# Altium PCB NBP7 Xilinx Virtex-II BGA456 Rev1.10.PcbDoc (part 1 of 3)
Units mm, origin at the board's own origin, x right, y up, seen from the top; angles counter-clockwise.
Board outline 69 x 80.99 mm, 6 copper layers (Top Layer, MidLayer1, InternalPlane1, InternalPlane2, MidLayer2, Bottom Layer); 101 components, 273 nets, 963 pads, 545 vias.
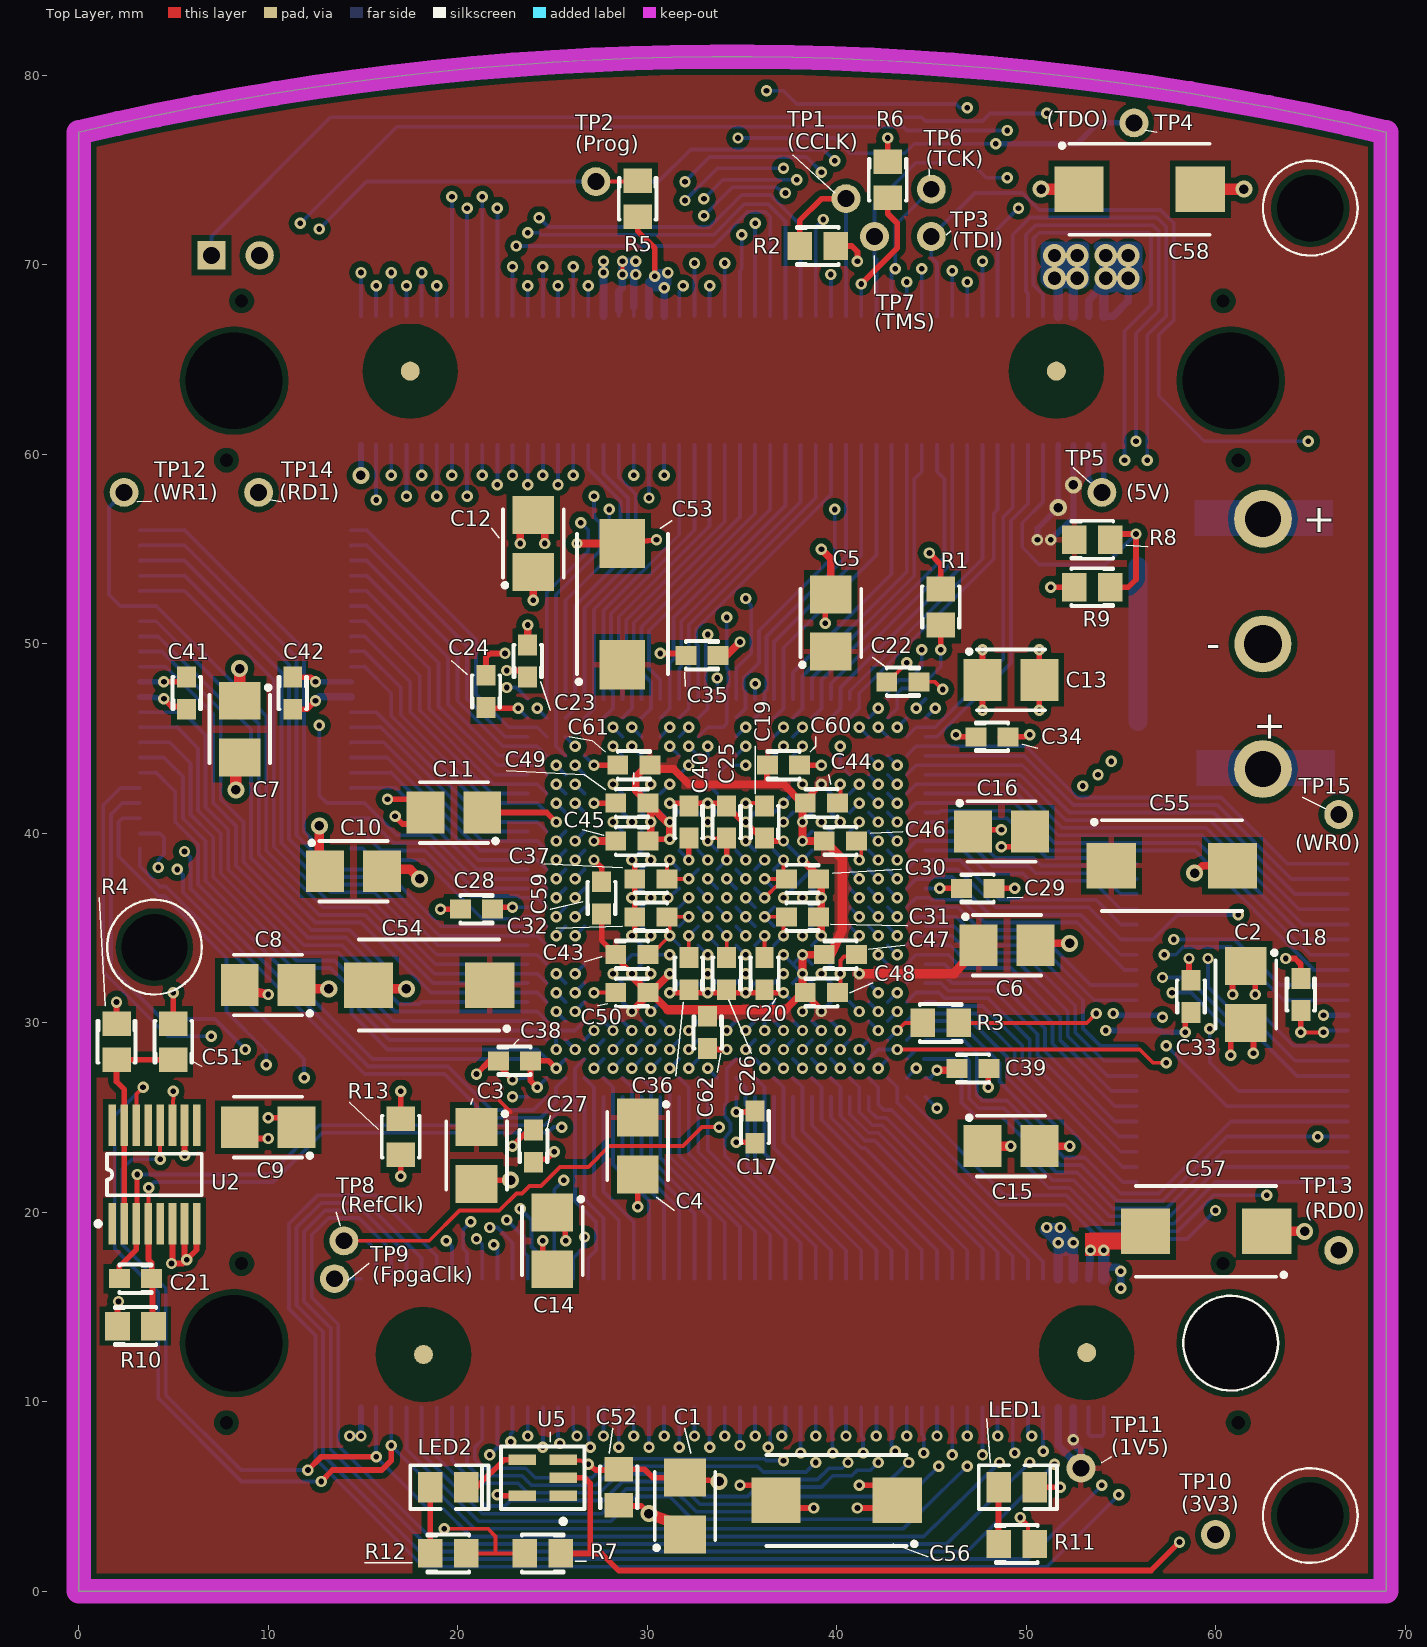
[diagram p0: Top Layer view]
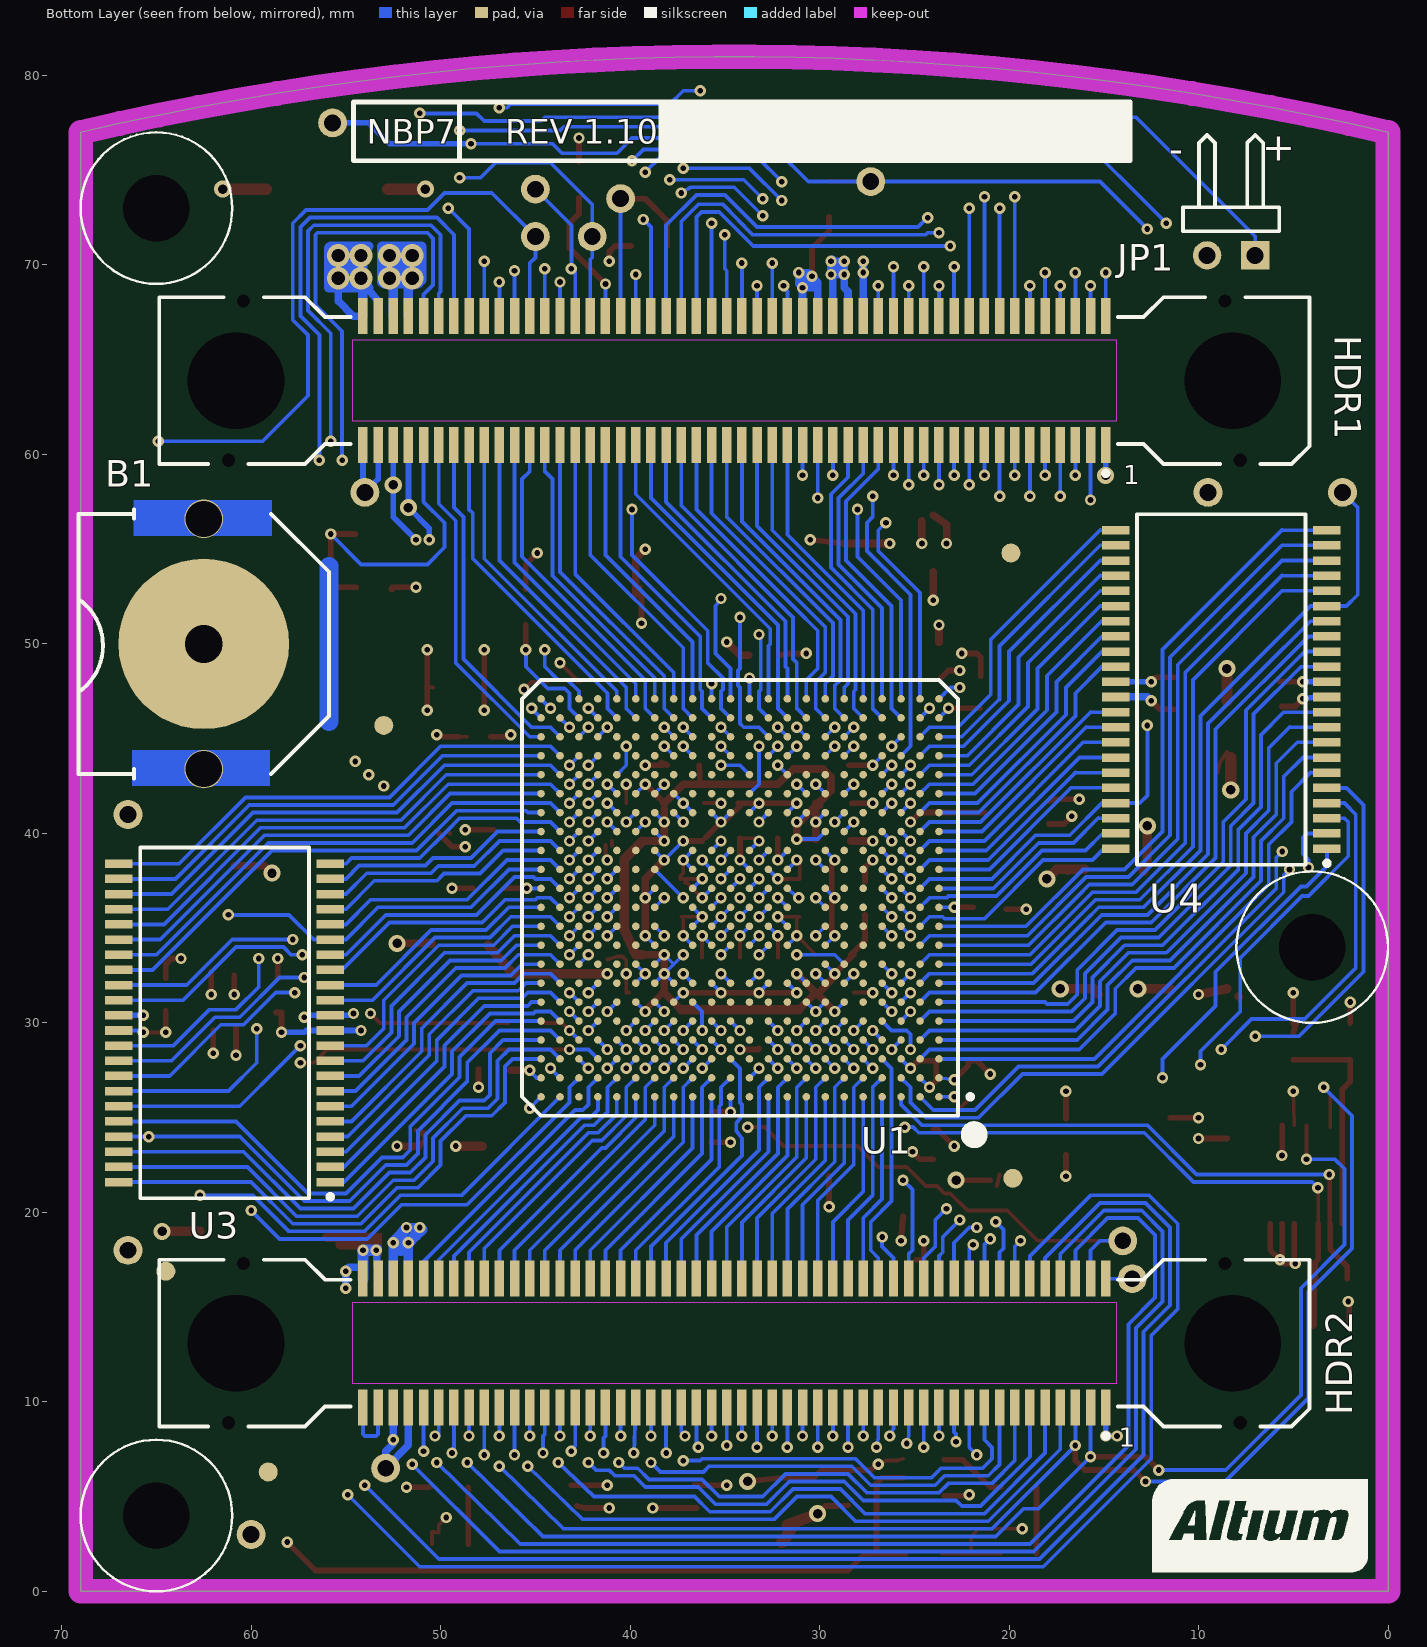
[diagram p1: Bottom Layer view, seen from below]
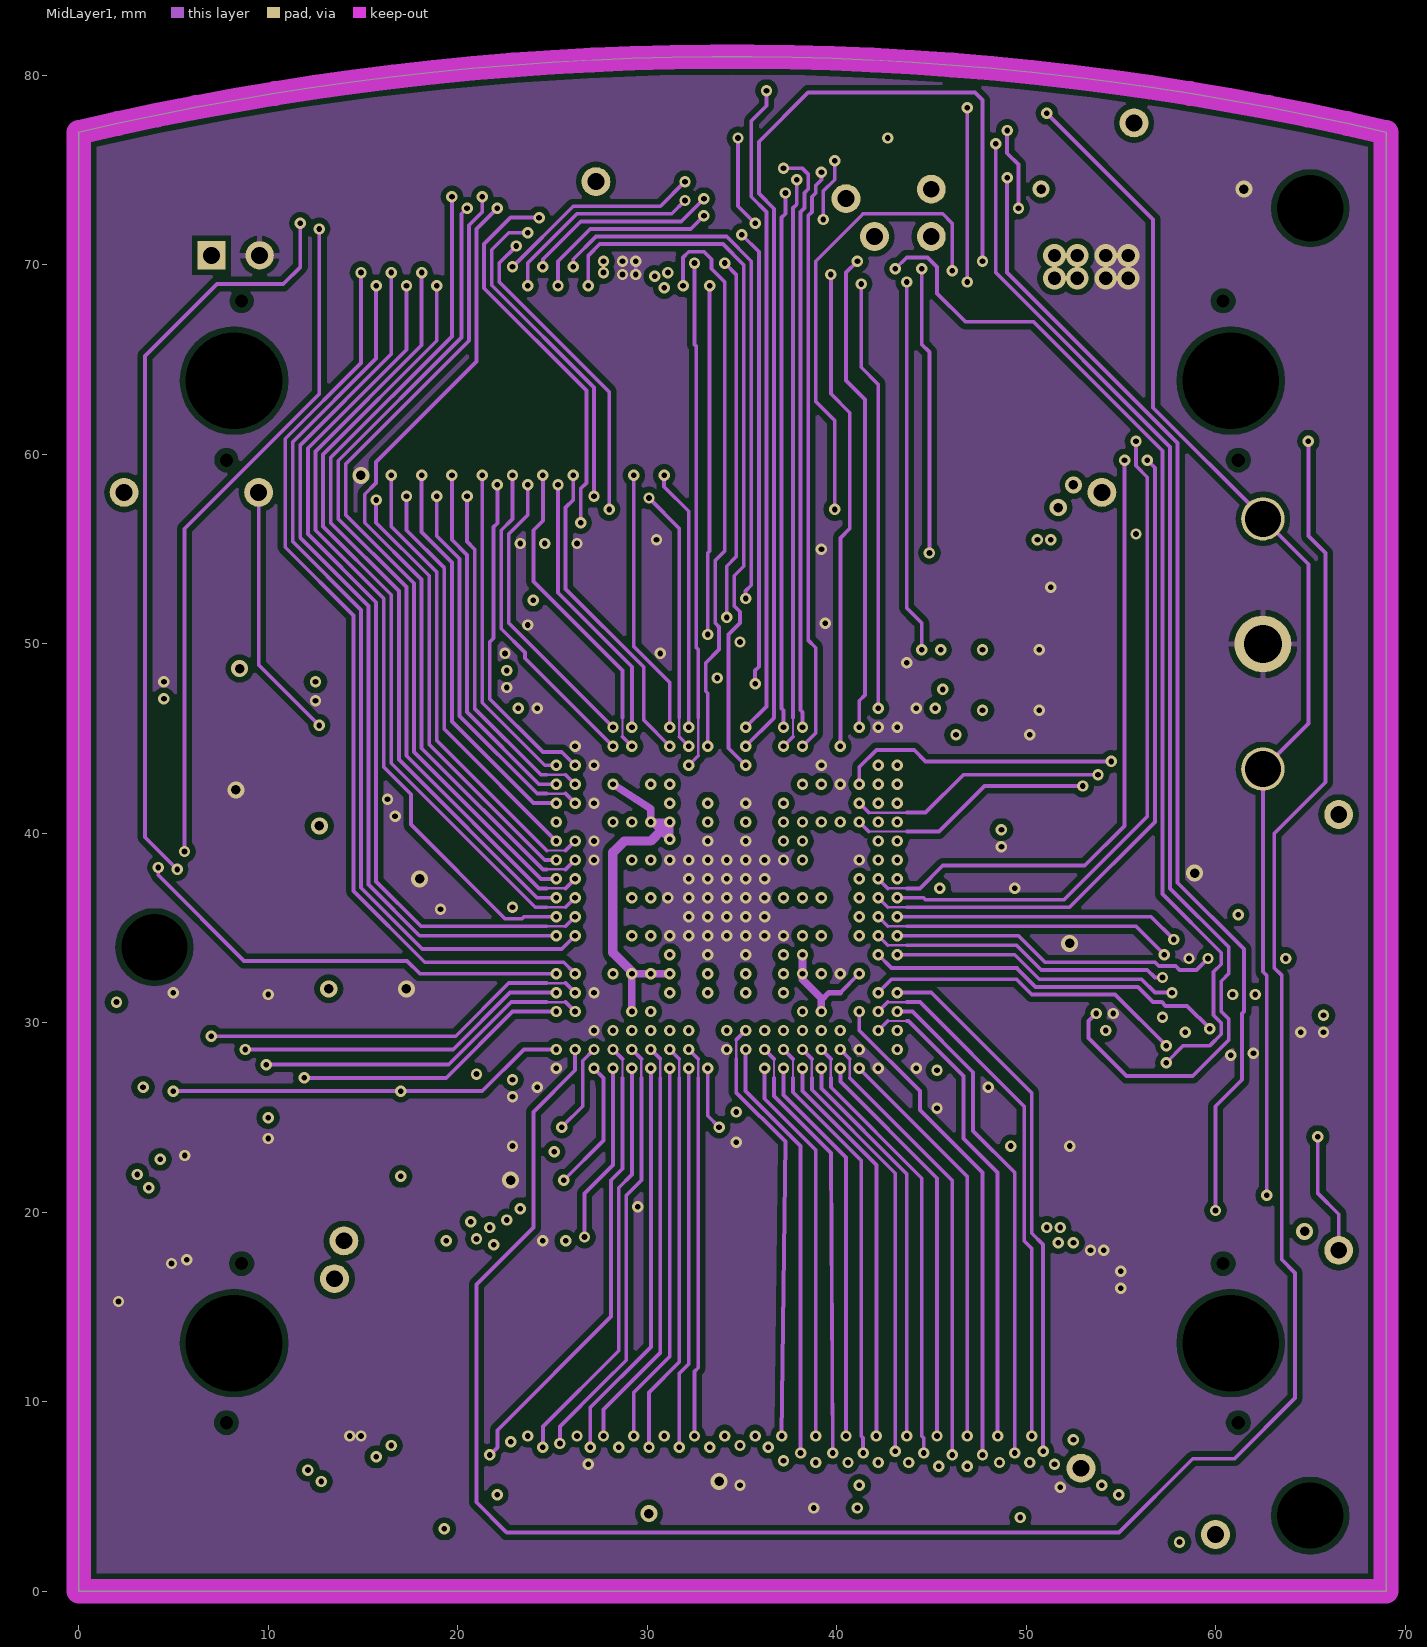
[diagram p2: MidLayer1]
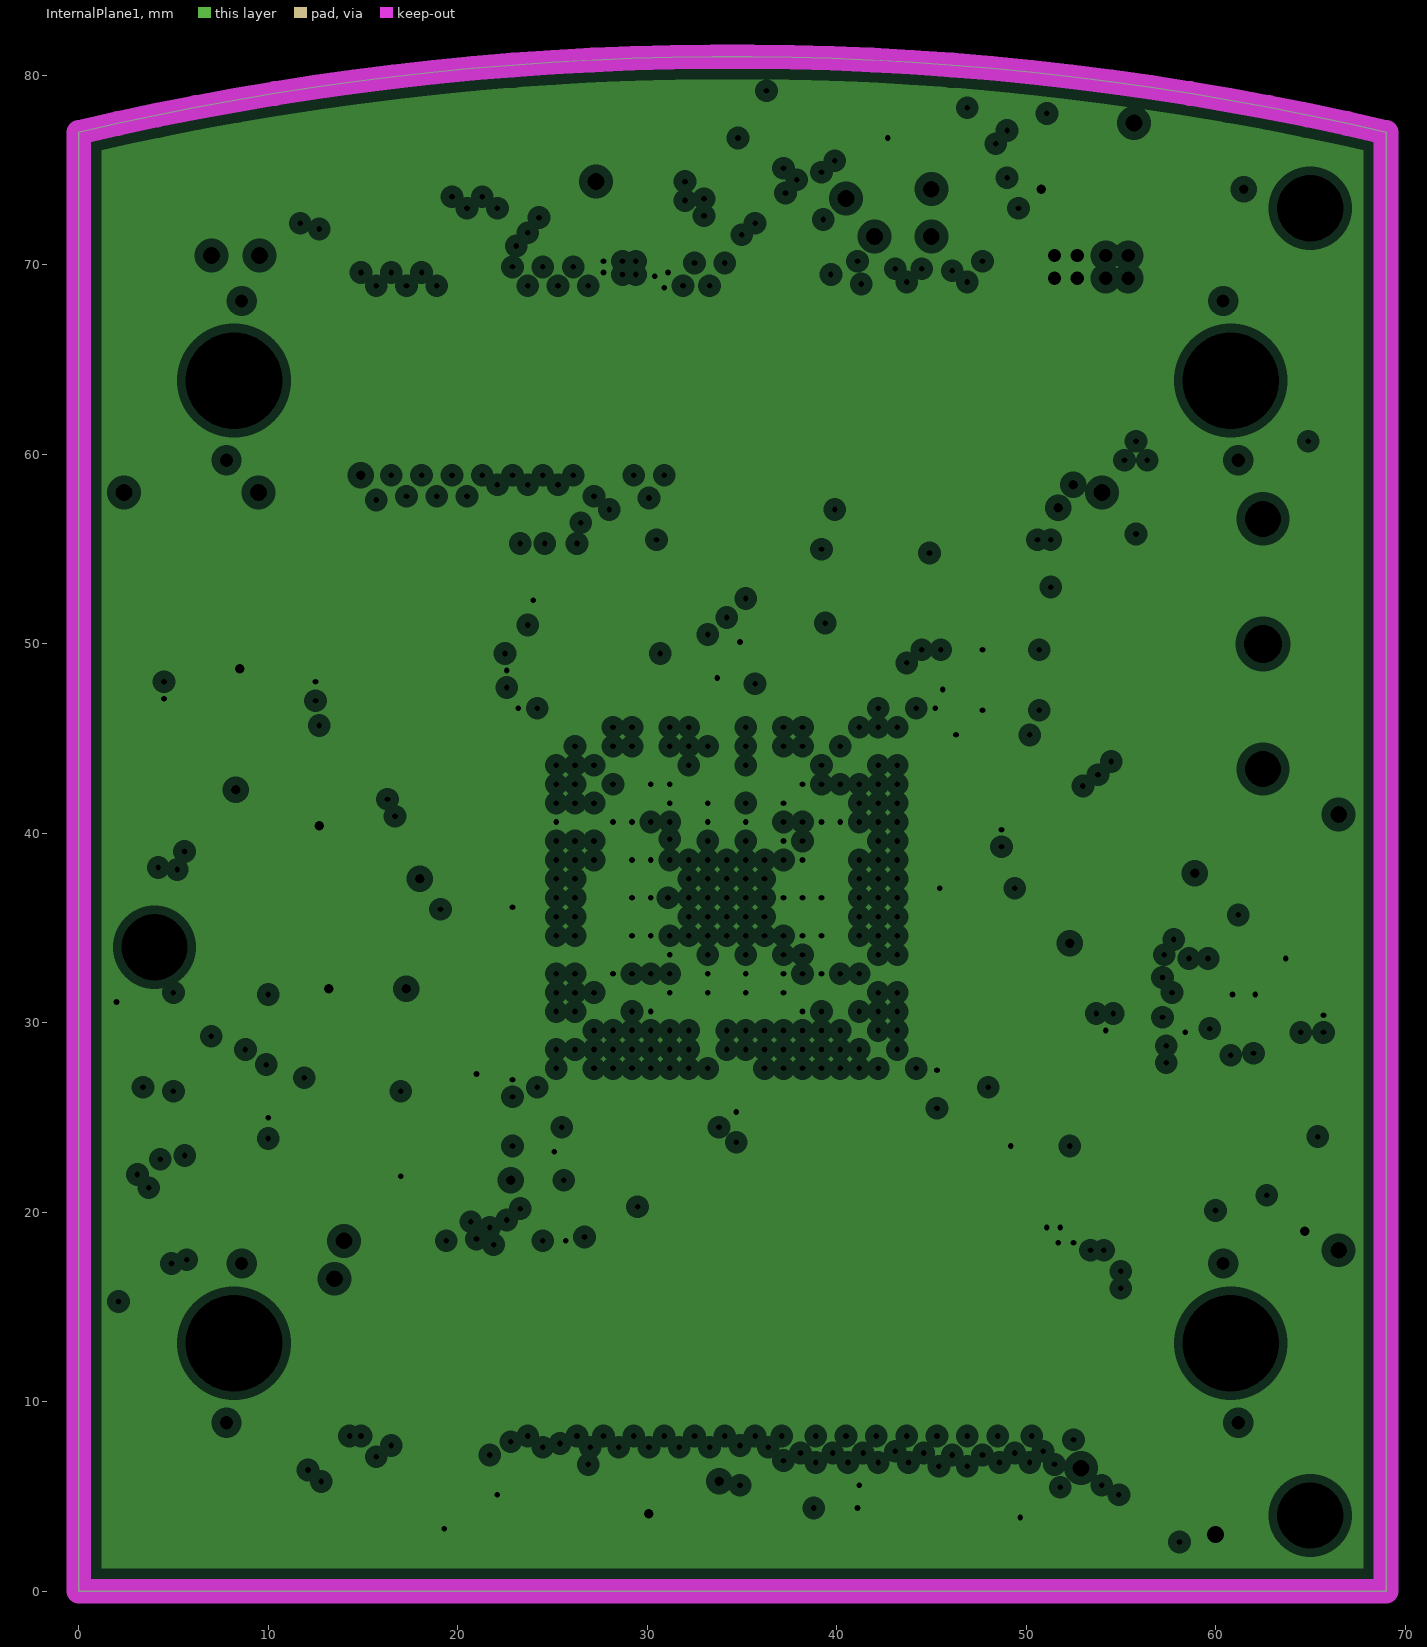
[diagram p3: InternalPlane1, clearances drawn from the general rule]
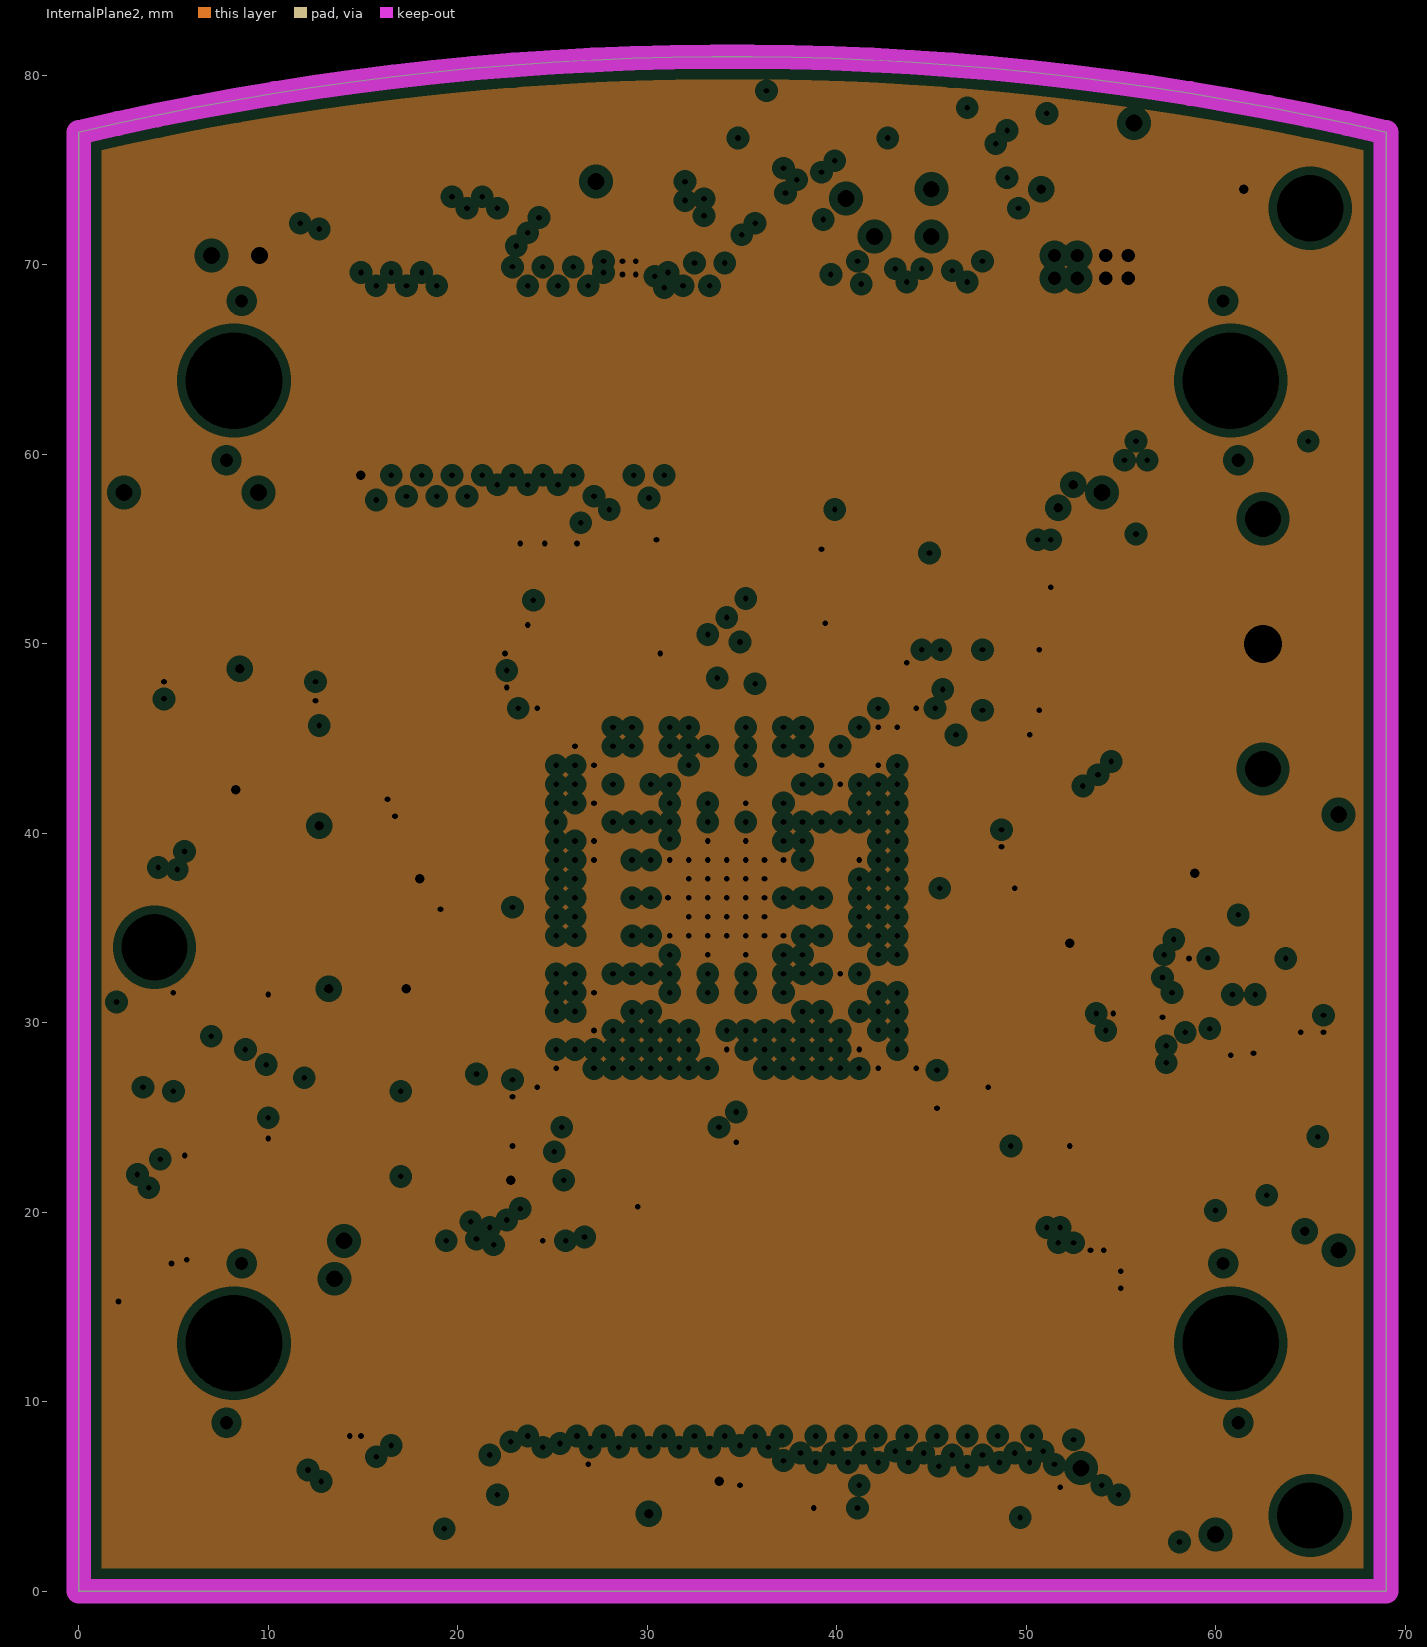
[diagram p4: InternalPlane2, clearances drawn from the general rule]
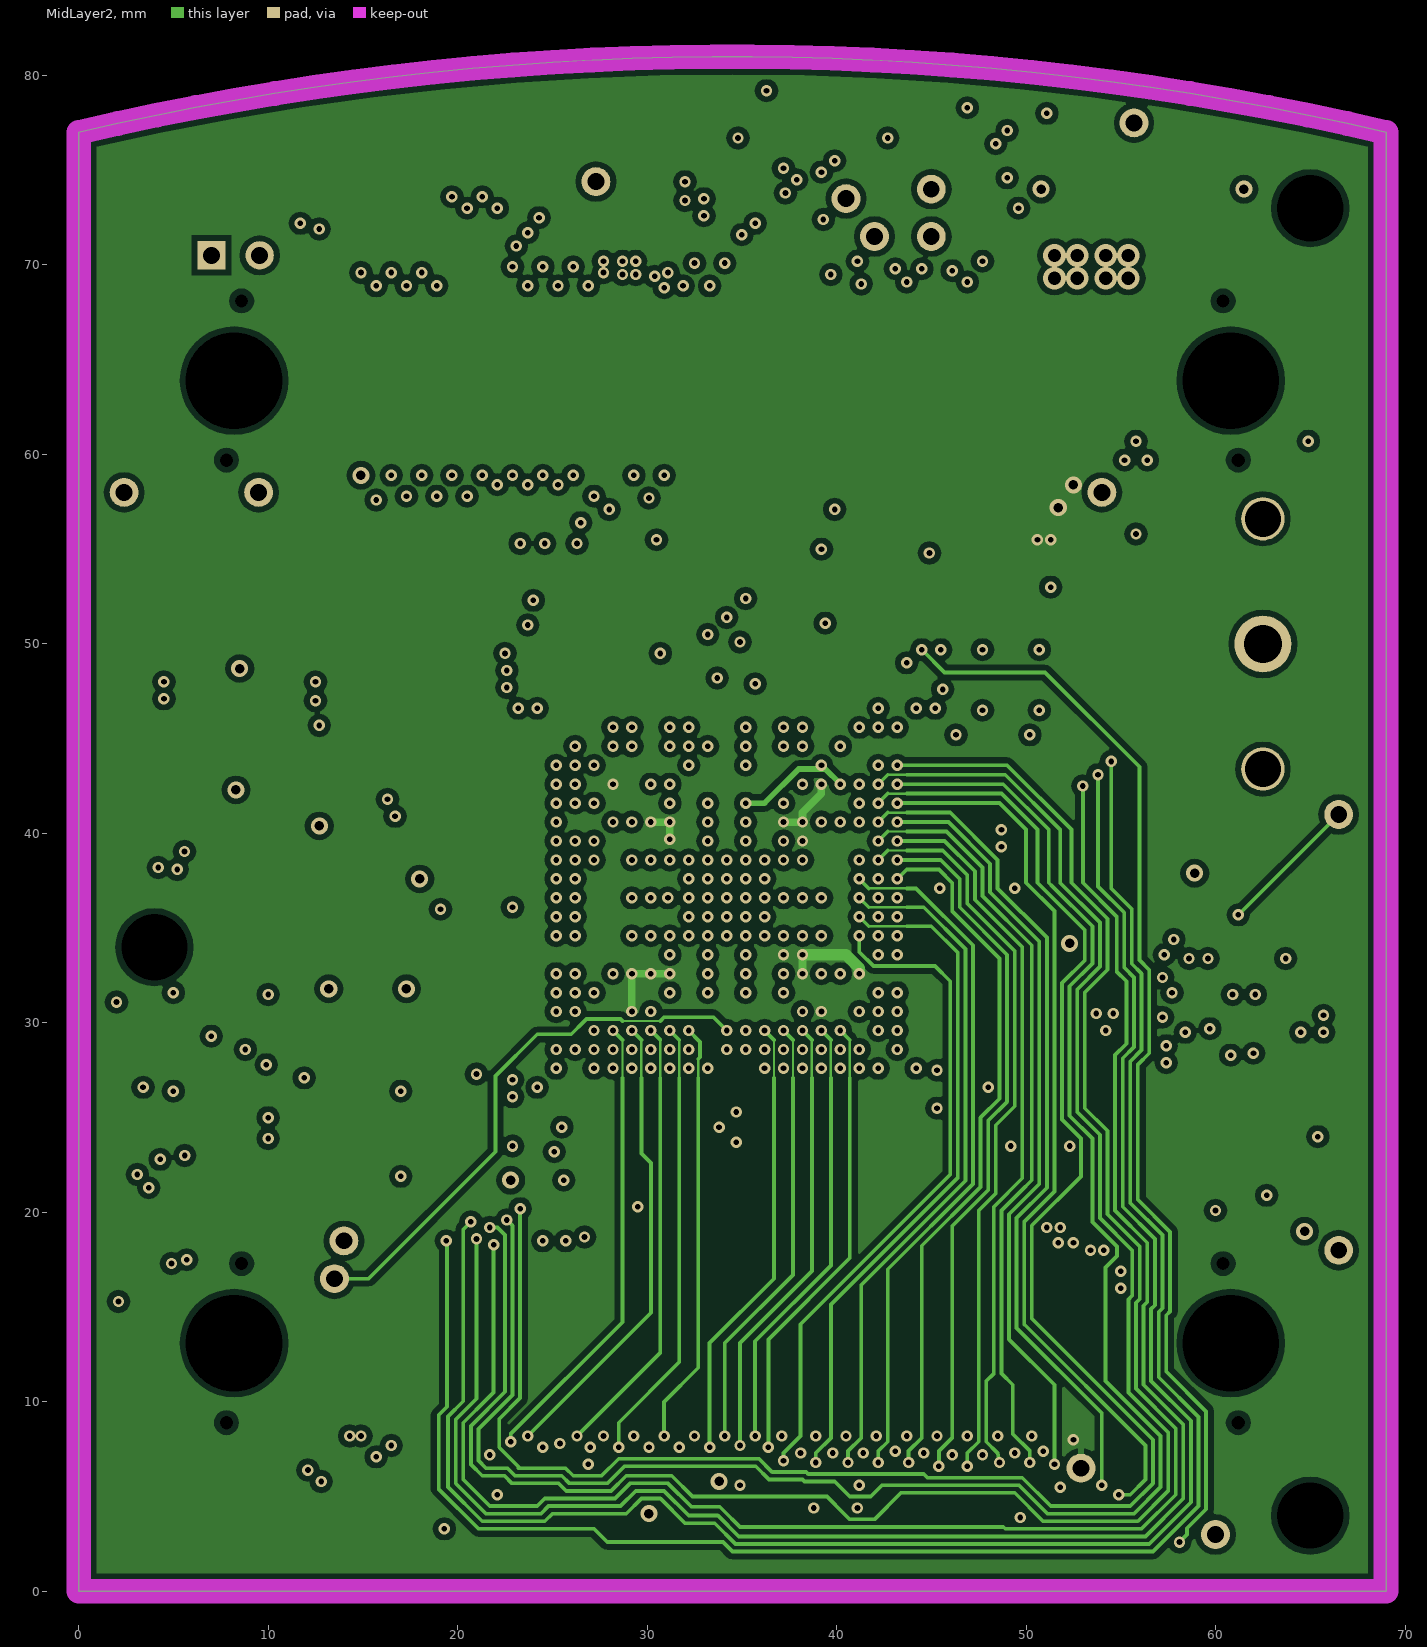
[diagram p5: MidLayer2]

## Layer stack, top to bottom
Top Layer: signal copper 0.0356
Dielectric: core 0.32, FR-4, Dk 4.8
MidLayer1: signal copper 0.0356
Dielectric: prepreg 0.32, FR-4, Dk 4.8
InternalPlane1: plane copper 0.0356, net VCC
Dielectric: core 0.32, FR-4, Dk 4.8
InternalPlane2: plane copper 0.0356, net GND
Dielectric: prepreg 0.32, FR-4, Dk 4.8
MidLayer2: signal copper 0.0356
Dielectric: core 0.32, FR-4, Dk 4.8
Bottom Layer: signal copper 0.0356

## Board outline
0,0 0.001,77 cw(c34.5,-69.801) 69,77 69,0

## Design rules (kind name [scope] priority, off if disabled: settings)
Clearance "Fiducial Clearance" [InPadClass('Fiducials')] p1: gap=2
Clearance Clearance_Polygons [InPolygon] p2: gap=0.3
Clearance "Via Pad Same Net" [IsVia vs IsPad] p3: gap=0.2
Clearance "Via-Via Clearance" [IsVia vs IsVia] p4: gap=0.3
Clearance "Mid Layer Track - Via Clearance" [(OnMid  And IsTrack) vs IsVia] p5: gap=0.127
Clearance "Bottom Layer General Clearance" [All vs OnLayer('Bottom Layer')] p6: gap=0.2
Clearance "Top Layer General Clearance" [All vs OnLayer('Top Layer')] p7: gap=0.2
Clearance "Clearance Top Layer Pads" [(OnLayer('Top Layer')) vs (InPadClass('All Pads'))] p8: gap=0.254
Clearance "General Clearance" [All] p9: gap=0.2
ComponentClearance [All] p1: gap=0.2 collisioncheckmode=3 verticalgap=0.254 showdistances=FALSE
FabricationTestPointUsage TestPointUsage [All] p1 off: valid=0 allowmultiple=FALSE
FabricationTestpoint Testpoint [All] p1 off: side=3 testpointundercomponent=TRUE minsize=1.016 maxsize=2.54 preferedsize=1.524 minholesize=0 maxholesize=1.016 preferedholesize=0.813 testpointgrid=0.025 allowsidetop=TRUE allowsidebottom=TRUE usegrid=TRUE gridtolerance=0
HoleSize [All] p1: absolutevalues=TRUE maxlimit=10 minlimit=0.3 maxpercent=80.000 minpercent=20.000
PlaneClearance [All] p1: clearance=0.45
PlaneConnect [All] p1: planeconnectstyle=Direct reliefexpansion=0.5 reliefentries=4 reliefconductorwidth=0.25 reliefairgap=0.25
PolygonConnect [All] p1: connectstyle=Relief reliefconductorwidth=0.3 reliefentries=4 polygonreliefangle="90 Angle"
RoutingVias [All] p1: holewidth=0.3 width=0.6 viastyle="Through Hole" minholewidth=0.3 minwidth=0.5 maxholewidth=0.5 maxwidth=1
SMDNeckDown [All] p1: percent=100.000
SilkscreenOverComponentPads [All] p1: minsilkscreentomaskgap=0.254
SolderMaskExpansion SolderMaskExpansion_Vias [IsVia] p1: expansion=-0.65
SolderMaskExpansion [All] p2: expansion=0.25
Width [All] p1: maxlimit=1.5 minlimit=0.127 preferedwidth=0.2 toplayer_minwidth=0.2 toplayer_prefwidth=0.203 bottomlayer_minwidth=0.2
21 further rules are at their usual default settings.

## Classes and differential pairs
pad class Fiducials: Free-4 Free-5 Free-6 Free-7
pad class PAR_DATA: U1-AA3 U1-AA4 U1-AA18 U1-AB4 U1-R18 U1-V17 U1-W5 U1-W18 U1-Y4 U1-Y5
pad class IO_CLK: U1-AB12 U1-B11 U1-E12 U1-V11
pad class IO: U1-A4 U1-A5 U1-A6 U1-A10 U1-A13 U1-A17 U1-A18 U1-A19 U1-AA5 U1-AA10 U1-AA13 U1-AA17 U1-AA18 U1-AA20 U1-AB5 U1-AB10 U1-AB13 U1-AB17 U1-AB18 U1-B4 U1-B5 U1-B6 U1-B10 U1-B12 U1-B13 U1-B17 U1-B18 U1-B19 U1-C1 U1-C2 U1-C4 U1-C5 U1-C6 U1-C10 U1-C12 U1-C13 U1-C18 U1-C21 U1-D1 U1-D2 U1-D6 U1-D10 U1-D13 U1-D17 U1-D18 U1-D21 U1-E1 U1-E2 U1-E3 U1-E4 U1-E5 U1-E6 U1-E7 U1-E8 U1-E10 U1-E11 U1-E13 U1-E14 U1-E16 U1-E17 U1-E18 U1-E19 U1-E20 U1-E21 U1-E22 U1-F10 U1-F11 U1-F18 U1-G1 U1-G2 U1-G21 U1-G22 U1-H1 U1-H2 U1-H3 U1-H4 U1-H5 U1-H19 U1-H20 U1-H21 U1-H22 U1-J6 U1-J17 U1-J18 U1-K1 U1-K2 U1-K3 U1-K4 U1-K21 U1-K22 U1-L2 U1-L3 U1-L4 U1-L5 U1-L17 U1-L18 U1-L19 U1-L20 U1-L21 U1-L22 U1-M1 U1-M2 U1-M3 U1-M4 U1-M5 U1-M6 U1-M17 U1-M18 U1-M19 U1-M20 U1-M21 U1-N1 U1-N2 U1-N17 U1-N21 U1-P5 U1-P6 U1-P17 U1-R1 U1-R2 U1-R3 U1-R4 U1-R18 U1-R19 U1-R20 U1-R21 U1-R22 U1-T1 U1-T2 U1-T21 U1-T22 U1-U3 U1-U4 U1-U5 U1-U10 U1-U11 U1-U12 U1-U13 U1-V3 U1-V4 U1-V5 U1-V6 U1-V7 U1-V9 U1-V10 U1-V12 U1-V13 U1-V19 U1-V20 U1-V21 U1-V22 U1-W1 U1-W2 U1-W6 U1-W10 U1-W13 U1-W17 U1-W21 U1-W22
pad class IN_ONLY: U1-A11 U1-AA11 U1-AA12 U1-C11 U1-D12 U1-F11 U1-F12 U1-F14 U1-J22 U1-W11 U1-W12 U1-Y12
pad class 500andUp: U1-A8 U1-A9 U1-A14 U1-A15 U1-AA8 U1-AA9 U1-AA14 U1-AA15 U1-AB8 U1-AB14 U1-AB15 U1-B8 U1-B9 U1-B14 U1-B15 U1-C9 U1-C14 U1-C15 U1-D9 U1-D14 U1-D15 U1-E9 U1-F9 U1-J1 U1-J2 U1-J3 U1-J4 U1-J5 U1-J19 U1-J20 U1-J21 U1-J22 U1-K5 U1-K6 U1-K17 U1-K18 U1-K19 U1-K20 U1-L6 U1-N3 U1-N4 U1-N5 U1-N6 U1-N18 U1-N19 U1-N20 U1-P1 U1-P2 U1-P3 U1-P4 U1-P18 U1-P19 U1-P20 U1-P21 U1-P22 U1-U11 U1-U14 U1-V9 U1-V14 U1-W8 U1-W9 U1-W14 U1-Y8 U1-Y14

## Components (designator, comment, footprint, x,y, rotation, side; value= is the part's Value field where it differs from the comment)
B1 "CoinCellHolder" COINCELLHOLDER12THM 62.5,43.396 r90 bottom
C1 "10uF" MCCT-B 32,4.5 r90 top
C2 "10uF" MCCT-B 61.6,31.5 r270 top
C3 "10uF" MCCT-B 21,23 r270 top
C4 "10uF" MCCT-B 29.5,23.5 r270 top
C5 "10uF" MCCT-B 39.7,51.1 r90 top
C6 "10uF" MCCT-B 49,34.1 r0 top
C7 "10uF" MCCT-B 8.5,45.5 r270 top
C8 "10uF" MCCT-B 10,32 r180 top
C9 "10uF" MCCT-B 10,24.5 r180 top
C10 "10uF" MCCT-B 14.5,38 r0 top
C11 "10uF" MCCT-B 19.8,41.1 r180 top
C12 "10uF" MCCT-B 24,55.3 r90 top
C13 "10uF" MCCT-B 49.2,48.1 r0 top
C14 "10uF" MCCT-B 25,18.5 r270 top
C15 "10uF" MCCT-B 49.2,23.5 r0 top
C16 "10uF" MCCT-B 48.7,40.1 r0 top
C17 "10nF" CC1608-0603#1 35.7,24.5 r270 top
C18 "10nF" CC1608-0603#1 64.5,31.5 r270 top
C19 "10nF" CC1608-0603#1 36.2,40.6 r90 top
C20 "10nF" CC1608-0603#2 36.2,32.6 r90 top
C21 "10nF" CC1608-0603#1 3,16.5 r180 top
C22 "10nF" CC1608-0603#1 43.5,48 r180 top
C23 "10nF" CC1608-0603#1 23.7,49.1 r90 top
C24 "10nF" CC1608-0603#1 21.5,47.5 r90 top
C25 "10nF" CC1608-0603#1 34.2,40.6 r270 top
C26 "10nF" CC1608-0603#1 34.2,32.6 r90 top
C27 "10nF" CC1608-0603#1 24,23.5 r90 top
C28 "10nF" CC1608-0603#1 21,36 r180 top
C29 "10nF" CC1608-0603#1 47.45,37.1 r0 top
C30 "10nF" CC1608-0603#1 38.2,37.6 r180 top
C31 "10nF" CC1608-0603#1 38.2,35.6 r180 top
C32 "10nF" CC1608-0603#1 30.2,35.6 r0 top
C33 "10nF" CC1608-0603#1 58.7,31.4 r90 top
C34 "10nF" CC1608-0603#1 48.2,45.1 r0 top
C35 "10nF" CC1608-0603#1 32.9,49.4 r180 top
C36 "10nF" CC1608-0603#1 32.2,32.6 r90 top
C37 "10nF" CC1608-0603#1 30.2,37.6 r0 top
C38 "10nF" CC1608-0603#1 23,28 r0 top
C39 "10nF" CC1608-0603#1 47.2,27.6 r0 top
C40 "10nF" CC1608-0603#1 32.2,40.6 r270 top
C41 "10nF" CC1608-0603#1 5.7,47.4 r90 top
C42 "10nF" CC1608-0603#1 11.3,47.4 r270 top
C43 "10nF" CC1608-0603#1 29.2,33.6 r0 top
C44 "10nF" CC1608-0603#1 39.2,41.6 r0 top
C45 "10nF" CC1608-0603#1 29.2,39.6 r180 top
C46 "10nF" CC1608-0603#1 40.2,39.6 r0 top
C47 "10nF" CC1608-0603#1 40.2,33.6 r0 top
C48 "10nF" CC1608-0603#1 39.2,31.6 r0 top
C49 "10nF" CC1608-0603#1 29.2,41.6 r180 top
C50 "10nF" CC1608-0603#1 29.2,31.6 r180 top
C51 "0.1uF" CC2012-0805 5,29 r90 top
C52 "0.1uF" CC2012-0805 28.5,5.5 r90 top
C53 "220uF/4V" MCCT-D 28.7,52.1 r90 top
C54 "220uF/4V" MCCT-D 18.5,32 r180 top
C55 "220uF/4V" MCCT-D 57.7,38.3 r0 top
C56 "220uF/4V" MCCT-D 40,4.8 r180 top
C57 "220uF/4V" MCCT-D 59.5,19 r180 top
C58 "220uF/4V" MCCT-D 56,74 r0 top
C59 "10nF" CC1608-0603#1 27.6,36.6 r90 top
C60 "10nF" CC1608-0603#1 37.2,43.6 r0 top
C61 "10nF" CC1608-0603#1 29.3,43.6 r180 top
C62 "10nF" CC1608-0603#1 33.2,29.5 r270 top
HDR1 "54075-1009-HD1" 54075 34.5,63.9 r0 bottom locked
HDR2 "54075-1009-HD2" 54075 34.5,13.1 r0 bottom locked
JP1 "Header 2H" HDR1X2H 7,70.5 r0 bottom
LED1 "HSMH-C170" "SMD _LED" 49.5,5.5 r180 top locked
LED2 "HSMG-C170" "SMD _LED" 19.5,5.5 r180 top locked
R1 "100R" CC2012-0805 45.5,51.95 r90 top
R2 "100R" CC2012-0805 39,71 r0 top
R3 "100R" CC2012-0805 45.5,30 r180 top
R4 "100R" CC2012-0805 2,29 r270 top
R5 "470R" CC2012-0805 29.5,73.5 r270 top
R6 "470R" CC2012-0805 42.7,74.5 r270 top
R7 "470R" CC2012-0805 24.5,2 r180 top
R8 "DO NOT INSTALL" CC2012-0805 53.5,55.5 r0 top
R9 "47R" CC2012-0805 53.5,53 r180 top
R10 "1M" CC2012-0805 3,14 r0 top
R11 "270R" CC2012-0805 49.5,2.5 r0 top
R12 "270R" CC2012-0805 19.5,2 r0 top
R13 "4k7" CR2012-0805 17,24 r90 top
TP1 "(CCLK)" TestPin 40.5,73.5 r0 top
TP2 "(Prog)" TestPin 27.3,74.4 r90 top
TP3 "(TDI)" TestPin 45,71.5 r90 top
TP4 "(TDO)" TestPin 55.7,77.5 r90 top
TP5 "(5V)" TestPin 54,58 r90 top
TP6 "(TCK)" TestPin 45,74 r90 top
TP7 "(TMS)" TestPin 42,71.5 r90 top
TP8 "(RefClk)" TestPin 14,18.5 r90 top
TP9 "(FpgaClk)" TestPin 13.5,16.5 r90 top
TP10 "(3V3)" TestPin 60,3 r90 top
TP11 "(1V5)" TestPin 52.9,6.5 r90 top
TP12 "(WR1)" TestPin 2.4,58 r90 top
TP13 "(RD0)" TestPin 66.5,18 r90 top
TP14 "(RD1)" TestPin 9.5,58 r90 top
TP15 "(WR0)" TestPin 66.5,41 r90 top
U1 "XC2V1000-4FG456C" FG456 34.2,36.6 r0 bottom
U2 "MAX1617DBR2" QSOP16 4,22 r0 top
U3 "SRAM 512Kx16 TSOP44" SO-G44/P.8 61.4,30 r90 bottom
U4 "SRAM 512Kx16 TSOP44" SO-G44/P.8 8.8,47.6 r90 bottom
U5 "SN74LVC1G04DBV" SO-G5/P.95 24.5,6 r90 top

## Footprints (in the part's own frame and the unit in brackets; to place one, negate y for a bottom-side part, rotate by r counter-clockwise, add the part's x,y. Pads: shape width x height; smd on the part's side, far side on the other; paste and mask are expansions set on the pad)
54075 [mm] "Connector; Docking Station, Receptacle; 100 Position; Vertical"
  rect 0.5x1.9 smd: 1(-19.6,3.4) 2(-19.6,-3.4) 3(-18.8,3.4) 4(-18.8,-3.4) 5(-18,3.4) 6(-18,-3.4) 7(-17.2,3.4) 8(-17.2,-3.4) 9(-16.4,3.4) 10(-16.4,-3.4) 11(-15.6,3.4) 12(-15.6,-3.4) 13(-14.8,3.4) 14(-14.8,-3.4) 15(-14,3.4) 16(-14,-3.4) 17(-13.2,3.4) 18(-13.2,-3.4) 19(-12.4,3.4) 20(-12.4,-3.4) 21(-11.6,3.4) 22(-11.6,-3.4) 23(-10.8,3.4) 24(-10.8,-3.4) 25(-10,3.4) 26(-10,-3.4) 27(-9.2,3.4) 28(-9.2,-3.4) 29(-8.4,3.4) 30(-8.4,-3.4) 31(-7.6,3.4) 32(-7.6,-3.4) 33(-6.8,3.4) 34(-6.8,-3.4) 35(-6,3.4) 36(-6,-3.4) 37(-5.2,3.4) 38(-5.2,-3.4) 39(-4.4,3.4) 40(-4.4,-3.4) 41(-3.6,3.4) 42(-3.6,-3.4) 43(-2.8,3.4) 44(-2.8,-3.4) 45(-2,3.4) 46(-2,-3.4) 47(-1.2,3.4) 48(-1.2,-3.4) 49(-0.4,3.4) 50(-0.4,-3.4) 51(0.4,3.4) 52(0.4,-3.4) 53(1.2,3.4) 54(1.2,-3.4) 55(2,3.4) 56(2,-3.4) 57(2.8,3.4) 58(2.8,-3.4) 59(3.6,3.4) 60(3.6,-3.4) 61(4.4,3.4) 62(4.4,-3.4) 63(5.2,3.4) 64(5.2,-3.4) 65(6,3.4) 66(6,-3.4) 67(6.8,3.4) 68(6.8,-3.4) 69(7.6,3.4) 70(7.6,-3.4) 71(8.4,3.4) 72(8.4,-3.4) 73(9.2,3.4) 74(9.2,-3.4) 75(10,3.4) 76(10,-3.4) 77(10.8,3.4) 78(10.8,-3.4) 79(11.6,3.4) 80(11.6,-3.4) 81(12.4,3.4) 82(12.4,-3.4) 83(13.2,3.4) 84(13.2,-3.4) 85(14,3.4) 86(14,-3.4) 87(14.8,3.4) 88(14.8,-3.4) 89(15.6,3.4) 90(15.6,-3.4) 91(16.4,3.4) 92(16.4,-3.4) 93(17.2,3.4) 94(17.2,-3.4) 95(18,3.4) 96(18,-3.4) 97(18.8,3.4) 98(18.8,-3.4) 99(19.6,3.4) 100(19.6,-3.4)
  round 0.5 hole 0.7 unplated: MH1(-26.7,4.2) MH2(-25.9,-4.2) MH3(26.7,4.2) MH4(25.9,-4.2)
  round 4.8 hole 5.1 unplated: MH5(-26.3,0) MH6(26.3,0)
  Top Layer keep-out region: -20.15,2.15 20.15,2.15 20.15,-2.15 -20.15,-2.15
  silkscreen extent -30.35,-4.4 30.35,5.02
CC1608-0603#1 [mm]
  rect 1.1x1 smd: 1(-0.85,0) 2(0.85,0)
  silkscreen extent -0.85,-0.75 0.85,0.75
CC1608-0603#2 [mm]
  rect 1.1x0.95 smd: 1(-0.85,0) 2(0.85,0)
  silkscreen extent -0.85,-0.75 0.85,0.75
CC2012-0805 [mm]
  rect 1.3x1.5 smd: 1(-0.95,0) 2(0.95,0)
  silkscreen extent -1.1,-1 1.1,1
COINCELLHOLDER12THM [mil] "Coin Cell Holder For 12\" Coin Battery Cell"
  round 80 / inner round 90 / far side round 120 hole 75: 0(0,0) 1(520,0)
  round 354.33 / inner round 118.11 / far side round 118.11 hole 78.74: 2(260,0)
  silkscreen extent -20,-260 540,261
CR2012-0805 [mm]
  rect 1.3x1.5 smd: 1(-0.95,0) 2(0.95,0)
  silkscreen extent -1.1,-1 1.1,1
FG456 [mm] "456-Ball Fine Pitch Ball Grid Array (FG456)"
  round 0.4 smd mask+0.2: A1(-10.5,10.5) A2(-9.5,10.5) A3(-8.5,10.5) A4(-7.5,10.5) A5(-6.5,10.5) A6(-5.5,10.5) A7(-4.5,10.5) A8(-3.5,10.5) A9(-2.5,10.5) A10(-1.5,10.5) A11(-0.5,10.5) A12(0.5,10.5) A13(1.5,10.5) A14(2.5,10.5) A15(3.5,10.5) A16(4.5,10.5) A17(5.5,10.5) A18(6.5,10.5) A19(7.5,10.5) A20(8.5,10.5) A21(9.5,10.5) A22(10.5,10.5) AA1(-10.5,-9.5) AA2(-9.5,-9.5) AA3(-8.5,-9.5) AA4(-7.5,-9.5) AA5(-6.5,-9.5) AA6(-5.5,-9.5) AA7(-4.5,-9.5) AA8(-3.5,-9.5) AA9(-2.5,-9.5) AA10(-1.5,-9.5) AA11(-0.5,-9.5) AA12(0.5,-9.5) AA13(1.5,-9.5) AA14(2.5,-9.5) AA15(3.5,-9.5) AA16(4.5,-9.5) AA17(5.5,-9.5) AA18(6.5,-9.5) AA19(7.5,-9.5) AA20(8.5,-9.5) AA21(9.5,-9.5) AA22(10.5,-9.5) AB1(-10.5,-10.5) AB2(-9.5,-10.5) AB3(-8.5,-10.5) AB4(-7.5,-10.5) AB5(-6.5,-10.5) AB6(-5.5,-10.5) AB7(-4.5,-10.5) AB8(-3.5,-10.5) AB9(-2.5,-10.5) AB10(-1.5,-10.5) AB11(-0.5,-10.5) AB12(0.5,-10.5) AB13(1.5,-10.5) AB14(2.5,-10.5) AB15(3.5,-10.5) AB16(4.5,-10.5) AB17(5.5,-10.5) AB18(6.5,-10.5) AB19(7.5,-10.5) AB20(8.5,-10.5) AB21(9.5,-10.5) AB22(10.5,-10.5) B1(-10.5,9.5) B2(-9.5,9.5) B3(-8.5,9.5) B4(-7.5,9.5) B5(-6.5,9.5) B6(-5.5,9.5) B7(-4.5,9.5) B8(-3.5,9.5) B9(-2.5,9.5) B10(-1.5,9.5) B11(-0.5,9.5) B12(0.5,9.5) B13(1.5,9.5) B14(2.5,9.5) B15(3.5,9.5) B16(4.5,9.5) B17(5.5,9.5) B18(6.5,9.5) B19(7.5,9.5) B20(8.5,9.5) B21(9.5,9.5) B22(10.5,9.5) C1(-10.5,8.5) C2(-9.5,8.5) C3(-8.5,8.5) C4(-7.5,8.5) C5(-6.5,8.5) C6(-5.5,8.5) C7(-4.5,8.5) C8(-3.5,8.5) C9(-2.5,8.5) C10(-1.5,8.5) C11(-0.5,8.5) C12(0.5,8.5) C13(1.5,8.5) C14(2.5,8.5) C15(3.5,8.5) C16(4.5,8.5) C17(5.5,8.5) C18(6.5,8.5) C19(7.5,8.5) C20(8.5,8.5) C21(9.5,8.5) C22(10.5,8.5) D1(-10.5,7.5) D2(-9.5,7.5) D3(-8.5,7.5) D4(-7.5,7.5) D5(-6.5,7.5) D6(-5.5,7.5) D7(-4.5,7.5) D8(-3.5,7.5) D9(-2.5,7.5) D10(-1.5,7.5) D11(-0.5,7.5) D12(0.5,7.5) D13(1.5,7.5) D14(2.5,7.5) D15(3.5,7.5) D16(4.5,7.5) D17(5.5,7.5) D18(6.5,7.5) D19(7.5,7.5) D20(8.5,7.5) D21(9.5,7.5) D22(10.5,7.5) E1(-10.5,6.5) E2(-9.5,6.5) E3(-8.5,6.5) E4(-7.5,6.5) E5(-6.5,6.5) E6(-5.5,6.5) E7(-4.5,6.5) E8(-3.5,6.5) E9(-2.5,6.5) E10(-1.5,6.5) E11(-0.5,6.5) E12(0.5,6.5) E13(1.5,6.5) E14(2.5,6.5) E15(3.5,6.5) E16(4.5,6.5) E17(5.5,6.5) E18(6.5,6.5) E19(7.5,6.5) E20(8.5,6.5) E21(9.5,6.5) E22(10.5,6.5) F1(-10.5,5.5) F2(-9.5,5.5) F3(-8.5,5.5) F4(-7.5,5.5) F5(-6.5,5.5) F6(-5.5,5.5) F7(-4.5,5.5) F8(-3.5,5.5) F9(-2.5,5.5) F10(-1.5,5.5) F11(-0.5,5.5) F12(0.5,5.5) F13(1.5,5.5) F14(2.5,5.5) F15(3.5,5.5) F16(4.5,5.5) F17(5.5,5.5) F18(6.5,5.5) F19(7.5,5.5) F20(8.5,5.5) F21(9.5,5.5) F22(10.5,5.5) G1(-10.5,4.5) G2(-9.5,4.5) G3(-8.5,4.5) G4(-7.5,4.5) G5(-6.5,4.5) G6(-5.5,4.5) G7(-4.5,4.5) G8(-3.5,4.5) G9(-2.5,4.5) G10(-1.5,4.5) G11(-0.5,4.5) G12(0.5,4.5) G13(1.5,4.5) G14(2.5,4.5) G15(3.5,4.5) G16(4.5,4.5) G17(5.5,4.5) G18(6.5,4.5) G19(7.5,4.5) G20(8.5,4.5) G21(9.5,4.5) G22(10.5,4.5) H1(-10.5,3.5) H2(-9.5,3.5) H3(-8.5,3.5) H4(-7.5,3.5) H5(-6.5,3.5) H6(-5.5,3.5) H7(-4.5,3.5) H16(4.5,3.5) H17(5.5,3.5) H18(6.5,3.5) H19(7.5,3.5) H20(8.5,3.5) H21(9.5,3.5) H22(10.5,3.5) J1(-10.5,2.5) J2(-9.5,2.5) J3(-8.5,2.5) J4(-7.5,2.5) J5(-6.5,2.5) J6(-5.5,2.5) J7(-4.5,2.5) J9(-2.5,2.5) J10(-1.5,2.5) J11(-0.5,2.5) J12(0.5,2.5) J13(1.5,2.5) J14(2.5,2.5) J16(4.5,2.5) J17(5.5,2.5) J18(6.5,2.5) J19(7.5,2.5) J20(8.5,2.5) J21(9.5,2.5) J22(10.5,2.5) K1(-10.5,1.5) K2(-9.5,1.5) K3(-8.5,1.5) K4(-7.5,1.5) K5(-6.5,1.5) K6(-5.5,1.5) K7(-4.5,1.5) K9(-2.5,1.5) K10(-1.5,1.5) K11(-0.5,1.5) K12(0.5,1.5) K13(1.5,1.5) K14(2.5,1.5) K16(4.5,1.5) K17(5.5,1.5) K18(6.5,1.5) K19(7.5,1.5) K20(8.5,1.5) K21(9.5,1.5) K22(10.5,1.5) L1(-10.5,0.5) L2(-9.5,0.5) L3(-8.5,0.5) L4(-7.5,0.5) L5(-6.5,0.5) L6(-5.5,0.5) L7(-4.5,0.5) L9(-2.5,0.5) L10(-1.5,0.5) L11(-0.5,0.5) L12(0.5,0.5) L13(1.5,0.5) L14(2.5,0.5) L16(4.5,0.5) L17(5.5,0.5) L18(6.5,0.5) L19(7.5,0.5) L20(8.5,0.5) L21(9.5,0.5) L22(10.5,0.5) M1(-10.5,-0.5) M2(-9.5,-0.5) M3(-8.5,-0.5) M4(-7.5,-0.5) M5(-6.5,-0.5) M6(-5.5,-0.5) M7(-4.5,-0.5) M9(-2.5,-0.5) M10(-1.5,-0.5) M11(-0.5,-0.5) M12(0.5,-0.5) M13(1.5,-0.5) M14(2.5,-0.5) M16(4.5,-0.5) M17(5.5,-0.5) M18(6.5,-0.5) M19(7.5,-0.5) M20(8.5,-0.5) M21(9.5,-0.5) M22(10.5,-0.5) N1(-10.5,-1.5) N2(-9.5,-1.5) N3(-8.5,-1.5) N4(-7.5,-1.5) N5(-6.5,-1.5) N6(-5.5,-1.5) N7(-4.5,-1.5) N9(-2.5,-1.5) N10(-1.5,-1.5) N11(-0.5,-1.5) N12(0.5,-1.5) N13(1.5,-1.5) N14(2.5,-1.5) N16(4.5,-1.5) N17(5.5,-1.5) N18(6.5,-1.5) N19(7.5,-1.5) N20(8.5,-1.5) N21(9.5,-1.5) N22(10.5,-1.5) P1(-10.5,-2.5) P2(-9.5,-2.5) P3(-8.5,-2.5) P4(-7.5,-2.5) P5(-6.5,-2.5) P6(-5.5,-2.5) P7(-4.5,-2.5) P9(-2.5,-2.5) P10(-1.5,-2.5) P11(-0.5,-2.5) P12(0.5,-2.5) P13(1.5,-2.5) P14(2.5,-2.5) P16(4.5,-2.5) P17(5.5,-2.5) P18(6.5,-2.5) P19(7.5,-2.5) P20(8.5,-2.5) P21(9.5,-2.5) P22(10.5,-2.5) R1(-10.5,-3.5) R2(-9.5,-3.5) R3(-8.5,-3.5) R4(-7.5,-3.5) R5(-6.5,-3.5) R6(-5.5,-3.5) R7(-4.5,-3.5) R16(4.5,-3.5) R17(5.5,-3.5) R18(6.5,-3.5) R19(7.5,-3.5) R20(8.5,-3.5) R21(9.5,-3.5) R22(10.5,-3.5) T1(-10.5,-4.5) T2(-9.5,-4.5) T3(-8.5,-4.5) T4(-7.5,-4.5) T5(-6.5,-4.5) T6(-5.5,-4.5) T7(-4.5,-4.5) T8(-3.5,-4.5) T9(-2.5,-4.5) T10(-1.5,-4.5) T11(-0.5,-4.5) T12(0.5,-4.5) T13(1.5,-4.5) T14(2.5,-4.5) T15(3.5,-4.5) T16(4.5,-4.5) T17(5.5,-4.5) T18(6.5,-4.5) T19(7.5,-4.5) T20(8.5,-4.5) T21(9.5,-4.5) T22(10.5,-4.5) U1(-10.5,-5.5) U2(-9.5,-5.5) U3(-8.5,-5.5) U4(-7.5,-5.5) U5(-6.5,-5.5) U6(-5.5,-5.5) U7(-4.5,-5.5) U8(-3.5,-5.5) U9(-2.5,-5.5) U10(-1.5,-5.5) U11(-0.5,-5.5) U12(0.5,-5.5) U13(1.5,-5.5) U14(2.5,-5.5) U15(3.5,-5.5) U16(4.5,-5.5) U17(5.5,-5.5) U18(6.5,-5.5) U19(7.5,-5.5) U20(8.5,-5.5) U21(9.5,-5.5) U22(10.5,-5.5) V1(-10.5,-6.5) V2(-9.5,-6.5) V3(-8.5,-6.5) V4(-7.5,-6.5) V5(-6.5,-6.5) V6(-5.5,-6.5) V7(-4.5,-6.5) V8(-3.5,-6.5) V9(-2.5,-6.5) V10(-1.5,-6.5) V11(-0.5,-6.5) V12(0.5,-6.5) V13(1.5,-6.5) V14(2.5,-6.5) V15(3.5,-6.5) V16(4.5,-6.5) V17(5.5,-6.5) V18(6.5,-6.5) V19(7.5,-6.5) V20(8.5,-6.5) V21(9.5,-6.5) V22(10.5,-6.5) W1(-10.5,-7.5) W2(-9.5,-7.5) W3(-8.5,-7.5) W4(-7.5,-7.5) W5(-6.5,-7.5) W6(-5.5,-7.5) W7(-4.5,-7.5) W8(-3.5,-7.5) W9(-2.5,-7.5) W10(-1.5,-7.5) W11(-0.5,-7.5) W12(0.5,-7.5) W13(1.5,-7.5) W14(2.5,-7.5) W15(3.5,-7.5) W16(4.5,-7.5) W17(5.5,-7.5) W18(6.5,-7.5) W19(7.5,-7.5) W20(8.5,-7.5) W21(9.5,-7.5) W22(10.5,-7.5) Y1(-10.5,-8.5) Y2(-9.5,-8.5) Y3(-8.5,-8.5) Y4(-7.5,-8.5) Y5(-6.5,-8.5) Y6(-5.5,-8.5) Y7(-4.5,-8.5) Y8(-3.5,-8.5) Y9(-2.5,-8.5) Y10(-1.5,-8.5) Y11(-0.5,-8.5) Y12(0.5,-8.5) Y13(1.5,-8.5) Y14(2.5,-8.5) Y15(3.5,-8.5) Y16(4.5,-8.5) Y17(5.5,-8.5) Y18(6.5,-8.5) Y19(7.5,-8.5) Y20(8.5,-8.5) Y21(9.5,-8.5) Y22(10.5,-8.5)
  silkscreen extent -12.27,-11.5 11.5,11.5
HDR1X2H [mm]
  rect 1.5x1.5 hole 0.9: 1(0.012,-0.007)
  round 1.5 hole 0.9: 2(2.552,-0.007)
  silkscreen extent -1.26,-6.36 3.82,-1.28
MCCT-B [mm]
  rect 2x2.2 smd: 1(-1.5,0) 2(1.5,0)
  silkscreen extent -2.3,-1.6 1.8,1.6
MCCT-D [mm]
  rect 2.6x2.4 smd: 1(-3.2,0) 2(3.2,0)
  silkscreen extent -4.2,-2.4 3.7,2.4
QSOP16 [mm] "SSOP; 16 Leads; Body Width 3.9 mm; Pitch 0.635 mm"
  rect 0.4x2.2 smd: 1(-2.222,-2.6) 2(-1.587,-2.6) 3(-0.953,-2.6) 4(-0.318,-2.6) 5(0.318,-2.6) 6(0.953,-2.6) 7(1.587,-2.6) 8(2.222,-2.6) 9(2.222,2.6) 10(1.587,2.6) 11(0.953,2.6) 12(0.318,2.6) 13(-0.318,2.6) 14(-0.953,2.6) 15(-1.587,2.6) 16(-2.222,2.6)
  silkscreen extent -3.1,-2.72 2.5,1.1
"SMD _LED" [mm]
  rect 1.3x1.6 smd: 1(0.95,0) 2(-0.95,0)
  silkscreen extent -2.13,-1.15 2,1.15
SO-G5/P.95 [mm]
  rect 0.55x1.45 smd: 1(-0.959,-1.07) 2(-0.009,-1.07) 3(0.941,-1.07) 4(0.941,1.08) 5(-0.959,1.08)
  silkscreen extent -2.43,-2.19 1.64,2.21
SO-G44/P.8 [mm]
  rect 0.45x1.45 smd: 1(-8.4,-5.575) 2(-7.6,-5.575) 3(-6.8,-5.575) 4(-6,-5.575) 5(-5.2,-5.575) 6(-4.4,-5.575) 7(-3.6,-5.575) 8(-2.8,-5.575) 9(-2,-5.575) 10(-1.2,-5.575) 11(-0.4,-5.575) 12(0.4,-5.575) 13(1.2,-5.575) 14(2,-5.575) 15(2.8,-5.575) 16(3.6,-5.575) 17(4.4,-5.575) 18(5.2,-5.575) 19(6,-5.575) 20(6.8,-5.575) 21(7.6,-5.575) 22(8.4,-5.575) 23(8.4,5.575) 24(7.6,5.575) 25(6.8,5.575) 26(6,5.575) 27(5.2,5.575) 28(4.4,5.575) 29(3.6,5.575) 30(2.8,5.575) 31(2,5.575) 32(1.2,5.575) 33(0.4,5.575) 34(-0.4,5.575) 35(-1.2,5.575) 36(-2,5.575) 37(-2.8,5.575) 38(-3.6,5.575) 39(-4.4,5.575) 40(-5.2,5.575) 41(-6,5.575) 42(-6.8,5.575) 43(-7.6,5.575) 44(-8.4,5.575)
  silkscreen extent -9.3,-5.7 9.25,4.45
TestPin [mil] "SingleTest Pin"
  round 60 hole 35: 1(0,0)

## Part data
C1 C2 C3 C4 C5 C6 C7 C8 C9 C10 C11 C12 C13 C14 C15 C16 C53 C54 C55 C56 C57 C58: library part CAP_POLAR, "Polar Capacitor"
C17 C18 C19 C20 C21 C22 C23 C24 C25 C26 C27 C28 C29 C30 C31 C32 C33 C34 C35 C36 C37 C38 C39 C40 C41 C42 C43 C44 C45 C46 C47 C48 C49 C50 C51 C52 C59 C60 C61 C62: library part CAP, "Capacitor"
HDR1 HDR2: "Board-to-Board, Docking Station, 0.80mm (.031\") Pitch, Shielded Receptacle, Vertical, Ultra Low Profile, SMT"
JP1: "Header, 2-Pin, Right Angle"
LED1: library part HSMX-C670, "Typical RED GaAs SMD LED Agilent make"
LED2: library part HSMX-C670, "Typical GREEN GaAs SMD LED Agilent make"
R1 R2 R3 R4 R5 R6 R7 R8 R9 R10 R11 R12 R13: library part RES, "Resistor"
TP1 TP2 TP3 TP4 TP5 TP6 TP7 TP8 TP9 TP10 TP11 TP12 TP13 TP14 TP15: library part TestPin
U1: "Virtex-II 1.5V FPGA, 456-Ball FBGA, Commercial Grade"
U2: "SMBus Temperature Sensor with Internal and External Diode Input"
U3 U4: "512Kx16Bit SRAM TSOP44"
U5: library part SN74AHC1G04DBVR

## Free pads (board coordinates)
  round 1 smd far side mask+1.6: 0(19.8,21.8) 1(19.9,54.8) 1(59.1,6.3) 2(53,45.7)
  round 1 smd far side paste+1.5: 3(64.5,16.9)
  round 1 smd mask+3: 4(18.2,12.5) 5(17.5,64.4) 6(51.6,64.4) 7(53.2,12.6)
  round 3.2 hole 3.5 unplated: LP(4,34) LP(65,4) LP(65,73)

## Via types
v1: diameter 0.6, hole 0.3, Top Layer to Bottom Layer, tented bottom, 520 vias
v2: diameter 0.9, hole 0.5, Top Layer to Bottom Layer, 17 vias
v3: diameter 1.2, hole 0.7, Top Layer to Bottom Layer, 8 vias

## Nets (pads, with @x,y where several pads share a name; then routed paths per layer and width w, separated by ;. In a path a pad name is that pad's centre, name@x,y a point inside that pad or via, vN(x,y) a via of type N, cw(c..) or ccw(c..) an arc to the next point about the centre after c; other vN are vias at no path point)
5_V: HDR1.97 HDR1.99 TP5.1 | length 5.3
  Bottom Layer w0.3: HDR1.97@53.3,60.5 53.3,58.7 TP5.1@54,58 54.1,58.1 HDR1.99@54.1,60.5
5V: HDR2.97 HDR2.99 | length 3.7
  Bottom Layer w0.2: HDR2.97@53.3,9.7 53.3,8.3 53.4,8.2 54,8.2 54.1,8.3 HDR2.99@54.1,9.7
AUDIO_SPI_CSN: HDR1.11 U1.T4 | length 23.5
  MidLayer1 w0.127: 24.7,42.1 25.7,42.1
  MidLayer1 w0.2: v1(18.9,57.8) 18.9,55.7 20.1,54.5 20.1,46.2 24.2,42.1 24.7,42.1 ; 25.7,42.1 v1(26.2,41.6)
  Bottom Layer w0.2: v1(18.9,57.8) HDR1.11@18.9,60.5 ; v1(26.2,41.6) U1.T4@26.7,41.1
BLUE0: HDR1.14 U1.M3 | length 52.2
  MidLayer1 w0.2: v1(19.7,73.6) 19.7,66.231 13.3,59.831 13.3,56.4 16.9,52.8 16.9,43.9 24.2,36.6 v1(25.2,36.6)
  Bottom Layer w0.2: HDR1.14@19.7,67.3 v1(19.7,73.6) ; v1(25.2,36.6) U1.M3@25.7,37.1
BLUE1: HDR1.16 U1.N4 | length 51.6
  MidLayer1 w0.127: 24.7,37.1 25.7,37.1
  MidLayer1 w0.2: v1(20.5,73) 20.2,72.7 20.2,66.166 13.7,59.666 13.7,56.6 17.3,53 17.3,44.1 24.3,37.1 24.7,37.1 ; 25.7,37.1 v1(26.2,37.6)
  Bottom Layer w0.2: HDR1.16@20.5,67.3 v1(20.5,73) ; v1(26.2,37.6) U1.N4@26.7,38.1
BOC_CTS: HDR1.13 U1.U3 | length 21.4
  MidLayer1 w0.2: v1(19.7,58.9) 19.7,55.5 20.5,54.7 20.5,46.4 24.3,42.6 v1(25.2,42.6)
  Bottom Layer w0.2: v1(19.7,58.9) HDR1.13@19.7,60.5 ; v1(25.2,42.6) U1.U3@25.7,42.1
BOC_RTS: HDR1.17 U1.V3 | length 19.6
  MidLayer1 w0.2: v1(21.3,58.9) 21.3,46.9 24.6,43.6 v1(25.2,43.6)
  Bottom Layer w0.2: v1(21.3,58.9) HDR1.17@21.3,60.5 ; v1(25.2,43.6) U1.V3@25.7,43.1
BOC_RX: HDR1.19 U1.V4 | length 20.2
  MidLayer1 w0.2: v1(22.1,58.4) 22.1,56.366 21.9,56.166 21.9,50.3 21.7,50.1 21.7,47.1 24.5,44.3 25.5,44.3 v1(26.2,43.6)
  Bottom Layer w0.2: v1(22.1,58.4) HDR1.19@22.1,60.5 ; v1(26.2,43.6) U1.V4@26.7,43.1
BOC_TX: HDR1.15 U1.U4 | length 21.7
  MidLayer1 w0.127: 24.7,43.1 25.7,43.1
  MidLayer1 w0.2: v1(20.5,57.8) 20.5,55.4 20.9,55 20.9,46.6 24.4,43.1 24.7,43.1 ; 25.7,43.1 v1(26.2,42.6)
  Bottom Layer w0.2: v1(20.5,57.8) HDR1.15@20.5,60.5 ; v1(26.2,42.6) U1.U4@26.7,42.1
BUZZER: HDR2.24 U1.V20 | length 104.4
  MidLayer2 w0.2: v1(22.6,19.6) 22.9,19.3 22.9,10.366 21.1,8.566 21.1,6.9 21.5,6.5 22.634,6.5 23.034,6.1 25.5,6.1 25.9,5.7 27.9,5.7 28.8,6.6 35.734,6.6 36.434,5.9 38.2,5.9 38.3,5.8 39.9,5.8 40.7,5 41.8,5 42.4,5.6 49.634,5.6 51.134,4.1 55.7,4.1 57.1,5.5 57.1,8.2 54.2,11.1 54.2,17.1 54.8,17.7 54.8,18.2 53.5,19.5 53.5,23.9 52.3,25.1 52.3,31.934 53.5,33.134 53.5,35.1 51.4,37.2 51.2,37.4 51.2,40.2 48.8,42.6 v1(43.2,42.6)
  Bottom Layer w0.2: v1(22.6,19.6) 23.5,18.7 23.5,17.9 23.7,17.7 HDR2.24@23.7,16.5 ; U1.V20@42.7,43.1 v1(43.2,42.6)
CAN_RXD: HDR1.4 U1.K4 | length 50.3
  MidLayer1 w0.2: v1(15.7,68.9) 15.7,65.06 11.3,60.66 11.3,55.4 14.9,51.8 14.9,37.131 18.131,33.9 25.5,33.9 v1(26.2,34.6)
  Bottom Layer w0.2: HDR1.4@15.7,67.3 v1(15.7,68.9) ; v1(26.2,34.6) U1.K4@26.7,35.1
CAN_TXD: HDR1.2 U1.H4 | length 52.3
  MidLayer1 w0.2: v1(14.9,69.6) 14.9,64.825 10.9,60.825 10.9,55.1 14.5,51.5 14.5,36.966 18.266,33.2 25.6,33.2 26.142,32.658 v1(26.2,32.6)
  Bottom Layer w0.2: HDR1.2@14.9,67.3 v1(14.9,69.6) ; v1(26.2,32.6) U1.H4@26.7,33.1
DXN: C21.1 R10.2 U1.D5 U2.4 | length 36.1
  Top Layer w0.2: U2.4@3.682,19.4 3.682,21.282 v1(3.7,21.3)
  Top Layer w0.3: U2.4@3.682,19.4 3.682,17.518 3.85,17.35 C21.1@3.85,16.5 3.9,16.45 3.9,14.05 R10.2@3.95,14
  MidLayer1 w0.2: v1(25.5,24.5) 26.6,25.6 26.6,28 v1(27.2,28.6)
  Bottom Layer w0.2: v1(3.7,21.3) 4,21.6 10.266,21.6 12.866,24.2 24.766,24.2 25.066,24.5 v1(25.5,24.5) ; v1(27.2,28.6) U1.D5@27.7,29.1
DXP: C21.2 U1.A3 U2.3 | length 33
  Top Layer w0.2: U2.3@3.047,19.4 3.1,19.452 v1(3.1,22) 3.047,21.947 U2.3@3.047,19.4
  Top Layer w0.3: C21.2@2.15,16.5 2.15,17.15 3.047,18.048 U2.3@3.047,19.4
  Bottom Layer w0.2: v1(3.1,22) 10.1,22 12.7,24.6 24.6,24.6 25.7,25.7 U1.A3@25.7,26.1
FPGA_AUX0: HDR1.86 U1.B3 | length 118
  MidLayer1 w0.2: v1(5.2,38.1) 3.5,39.8 3.5,65.2 7.3,69 10.8,69 11.7,69.9 v1(11.7,72.2) ; v1(49,77.1) 49,75.9 49.6,75.3 v1(49.6,73)
  Bottom Layer w0.2: v1(5.2,38.1) 5.5,37.8 5.5,36.9 15.1,27.3 19.3,27.3 21.6,25 24.4,25 25.2,25.8 25.2,26.6 U1.B3@25.7,27.1 ; v1(11.7,72.2) 16.8,77.3 43.5,77.3 43.7,77.1 v1(49,77.1) ; HDR1.86@48.5,67.3 48.5,71.9 v1(49.6,73)
FPGA_AUX1: HDR1.88 U1.M19 | length 62.3
  MidLayer1 w0.127: 42.7,36.1 43.7,36.1
  MidLayer1 w0.2: v1(42.2,36.6) 42.7,36.1 ; 43.7,36.1 52.3,36.1 56.8,40.6 56.8,59.3 v1(56.4,59.7)
  Bottom Layer w0.2: U1.M19@41.7,37.1 v1(42.2,36.6) ; HDR1.88@49.3,67.3 49.3,71.6 50.2,72.5 56.9,72.5 57.4,72 57.4,67.3 56.4,66.3 v1(56.4,59.7)
FPGA_AUX2: HDR1.90 U1.M20 | length 59.1
  MidLayer1 w0.2: v1(43.2,36.6) 44.6,36.6 44.7,36.5 52,36.5 56.4,40.9 56.4,58.8 55.8,59.4 v1(55.8,60.7)
  Bottom Layer w0.2: U1.M20@42.7,37.1 v1(43.2,36.6) ; HDR1.90@50.1,67.3 50.1,68.5 50,68.6 50,71.6 50.5,72.1 56.7,72.1 57,71.8 57,67.6 55.8,66.4 v1(55.8,60.7)
FPGA_AUX3: HDR1.92 U1.N19 | length 57.7
  MidLayer1 w0.127: 42.7,37.1 43.7,37.1
  MidLayer1 w0.2: v1(42.2,37.6) 42.7,37.1 ; 43.7,37.1 44.4,37.1 45.6,38.3 53.1,38.3 55.2,40.4 v1(55.2,59.7)
  Bottom Layer w0.2: U1.N19@41.7,38.1 v1(42.2,37.6) ; HDR1.92@50.9,67.3 50.9,68.45 50.4,68.95 50.4,71.4 50.7,71.7 56.5,71.7 56.6,71.6 56.6,67.9 55.2,66.5 v1(55.2,59.7)
FPGA_CCLK: HDR1.66 R2.1 TP1.1 | length 10.5
  Top Layer w0.3: R2.1@38.05,71 38.05,72.35 39.2,73.5 TP1.1@40.5,73.5
  Bottom Layer w0.2: HDR1.66@40.5,67.3 TP1.1@40.5,73.5
FPGA_CLK: HDR2.2 TP9.1 U1.E12 | length 31.2
  MidLayer2 w0.127: 28.7,30.1 30.7,30.1
  MidLayer2 w0.2: TP9.1@13.5,16.5 15.3,16.5 22,23.2 22,27.2 24.2,29.4 26,29.4 26.7,30.1 26.8,30.2 28.6,30.2 28.7,30.1 ; 30.7,30.1 30.9,30.3 33.5,30.3 v1(34.2,29.6)
  Bottom Layer w0.2: TP9.1@13.5,16.5 HDR2.2@14.9,16.5 ; v1(34.2,29.6) U1.E12@34.7,30.1
FPGA_CLK_1: HDR1.30 U1.AB12 | length 37.1
  MidLayer1 w0.2: v1(26.1,69.9) 26.1,70.3 27.3,71.5 34.2,71.5 35.5,70.2 35.5,53.1 35.2,52.8 v1(35.2,52.4)
  Bottom Layer w0.2: HDR1.30@26.1,67.3 v1(26.1,69.9) ; U1.AB12@34.7,47.1 34.7,48.7 35.5,49.5 35.5,52 v1(35.2,52.4)
FPGA_CLK_2: HDR1.32 U1.V11 | length 41.2
  MidLayer1 w0.2: v1(26.9,68.9) 26.9,70.5 27.5,71.1 34,71.1 35.1,70 35.1,54.1 34.6,53.6 34.6,52 34.9,51.7 34.9,51.1 34.3,50.5 34.3,44.5 v1(35.2,43.6)
  Bottom Layer w0.2: HDR1.32@26.9,67.3 v1(26.9,68.9) ; U1.V11@33.7,43.1 34.2,43.6 v1(35.2,43.6)
FPGA_DIN: HDR1.64 U1.V18 | length 29.4
  MidLayer1 w0.2: v1(39.7,69.5) 39.7,63.2 40.7,62.2 40.7,56.1 40.2,55.6 v1(40.2,44.6)
  Bottom Layer w0.2: HDR1.64@39.7,67.3 v1(39.7,69.5) ; v1(40.2,44.6) 40.2,43.6 U1.V18@40.7,43.1
FPGA_DONE: HDR1.74 R7.1 U1.AB20 U5.2 | length 121.7
  Top Layer w0.3: R7.1@25.45,2 27,2 ; U5.2@25.57,5.991 26.709,5.991 27,5.7 27,2 ; v1(58.1,2.6) 56.6,1.1 28.5,1.1 27.6,2 27,2
  MidLayer1 w0.2: v1(43.7,69.1) 43.7,51.9 44.214,51.386 44.5,51.1 v1(44.5,49.7)
  MidLayer2 w0.2: v1(44.5,49.7) 45.7,48.5 51,48.5 55.981,43.519 55.981,33.319 56.5,32.8 56.5,28.403 55.9,27.803 55.9,20.666 57.6,18.966 57.6,14.772 57.4,14.572 57.4,11.6 59.5,9.5 59.5,4.334 58.5,3.334 58.5,3 v1(58.1,2.6)
  Bottom Layer w0.2: U1.AB20@42.7,47.1 42.7,47.5 43.3,48.1 43.8,48.1 44.5,48.8 v1(44.5,49.7) ; HDR1.74@43.7,67.3 v1(43.7,69.1)
FPGA_INIT: HDR1.68 R6.2 U1.AA19 | length 30.7
  Top Layer w0.3: v1(41.3,69) 43.2,70.9 43.2,72.2 42.7,72.7 R6.2@42.7,73.55
  MidLayer1 w0.2: v1(41.3,69) 41.3,64.6 42.2,63.7 v1(42.2,46.6)
  Bottom Layer w0.2: HDR1.68@41.3,67.3 v1(41.3,69) ; U1.AA19@41.7,46.1 v1(42.2,46.6)
FPGA_M0: HDR1.60 U1.AB2 | length 51.1
  MidLayer1 w0.2: v1(24.3,72.5) 22.8,72.5 21.4,71.1 21.4,68.769 26.8,63.369 26.8,58.5 26.5,58.2 v1(26.5,56.4)
  Bottom Layer w0.2: v1(24.3,72.5) 24.8,72 33.3,72 35,73.7 36.5,73.7 38.1,72.1 HDR1.60@38.1,67.3 ; U1.AB2@24.7,47.1 24.7,52.7 26.9,54.9 26.9,56 v1(26.5,56.4)
FPGA_M1: HDR1.58 U1.W3 | length 52.3
  MidLayer1 w0.2: v1(23.7,71.7) 22.7,71.7 21.8,70.8 21.8,68.934 27.2,63.534 v1(27.2,57.8)
  Bottom Layer w0.2: v1(23.7,71.7) 24.3,71.7 24.4,71.6 33.534,71.6 35.1,73.2 36.4,73.2 37.3,72.3 HDR1.58@37.3,67.3 HDR1.58@37.3,67.2 ; U1.W3@25.7,44.1 25.2,44.6 25.2,52.6 27.5,54.9 27.5,56.4 27.2,56.7 v1(27.2,57.8)
FPGA_M2: HDR1.56 U1.AB3 | length 47
  MidLayer1 w0.2: v1(23.1,71) 22.2,70.1 22.2,69.1 28,63.3 v1(28,57.1)
  Bottom Layer w0.2: v1(23.1,71) 33.5,71 35.3,72.8 36.234,72.8 36.5,72.534 HDR1.56@36.5,67.3 ; 25.697,52.303 25.703,52.303 28,54.6 v1(28,57.1) ; U1.AB3@25.7,47.1 25.7,52.2
FPGA_PROGRAM: HDR1.62 R5.1 TP2.1 U1.A2 | length 101.8
  Top Layer w0.2: TP2.1@27.3,74.4 29.45,74.4 R5.1@29.5,74.45
  MidLayer1 w0.2: v1(5.589,39.045) 5.589,56.08 12.7,63.191 v1(12.7,71.9) ; v1(39.3,72.4) 39.3,73.9 39.9,74.5 v1(39.9,75.5)
  Bottom Layer w0.2: v1(5.589,39.045) 5.9,38.734 5.9,37.1 15.3,27.7 19.5,27.7 21.8,25.4 24,25.4 U1.A2@24.7,26.1 ; v1(12.7,71.9) 15.2,74.4 TP2.1@27.3,74.4 30.6,74.4 32.3,76.1 39.3,76.1 v1(39.9,75.5) ; HDR1.62@38.9,67.3 38.9,72 v1(39.3,72.4)
FPGA_TCK: HDR1.72 TP6.1 U1.C19 | length 79.1
  Top Layer w0.2: v1(43.2,28.6) 56,28.6 56.7,27.9 v1(57.4,27.9)
  MidLayer1 w0.2: v1(43.1,69.8) 43.7,70.4 44.8,70.4 45.3,69.9 45.3,68.5 46.8,67 50.4,67 57.2,60.2 57.2,36.8 60.3,33.7 60.3,33.1 59.9,32.7 59.9,30.4 60.3,30 60.3,29.4 59.7,28.8 58.3,28.8 v1(57.4,27.9)
  Bottom Layer w0.2: U1.C19@41.7,28.1 42.2,28.6 v1(43.2,28.6) ; HDR1.72@42.9,67.3 42.9,69.6 v1(43.1,69.8) 43.1,72.1 TP6.1@45,74
FPGA_TDI: HDR1.78 TP3.1 U1.D3 | length 163.1
  MidLayer1 w0.2: v1(26.2,28.6) 26.2,27.5 24,25.3 24,19.2 21,16.2 21,4.7 22.534,3.166 22.6,3.1 54.9,3.1 58.8,7 61,7 64.2,10.2 64.2,16.8 63.5,17.5 63.5,32.5 63.1,32.9 63.1,40 65.8,42.7 65.8,54.8 64.9,55.7 v1(64.9,60.7)
  Bottom Layer w0.2: U1.D3@25.7,29.1 v1(26.2,28.6) ; HDR1.78@45.3,67.3 45.3,70.1 45,70.4 TP3.1@45,71.5 47.3,73.8 49.8,73.8 50.7,72.9 57.1,72.9 57.8,72.2 57.8,67.1 57,66.3 57,63.1 59.4,60.7 v1(64.9,60.7)
FPGA_TDO: HDR1.54 R3.1 TP4.1 | length 102.3
  Top Layer w0.2: R3.1@46.45,30 53.2,30 v1(53.7,30.5)
  MidLayer1 w0.2: v1(34.8,76.7) 34.8,73.1 v1(35.7,72.2) ; v1(48.4,76.4) 48.4,69.6 57.6,60.4 57.6,37.1 60.7,34 60.7,32.6 60.3,32.2 60.3,30.6 60.7,30.2 60.7,29.1 58.8,27.2 55.3,27.2 53.3,29.2 53.3,30.1 v1(53.7,30.5)
  Bottom Layer w0.2: v1(34.8,76.7) 39.9,76.7 40.7,75.9 43.6,75.9 44.1,76.4 v1(48.4,76.4) ; HDR1.54@35.7,67.3 v1(35.7,72.2)
  Bottom Layer w0.3: v1(48.4,76.4) 52.7,76.4 53.8,77.5 TP4.1@55.7,77.5
FPGA_TMS: HDR1.70 TP7.1 U1.B20 | length 96.4
  MidLayer1 w0.2: v1(49,74.6) 49,69.6 58,60.6 58,37.4 61.5,33.9 61.5,30.6 61.4,30.5 61.4,27 60,25.6 v1(60,20.1)
  Bottom Layer w0.2: HDR1.70@42.1,67.3 42.1,70.3 42,70.4 TP7.1@42,71.5 42,73.2 44.2,75.4 47.1,75.4 47.9,74.6 v1(49,74.6) ; U1.B20@42.7,27.1 43.2,26.6 43.2,25.8 48.6,20.4 52.069,20.4 53.869,18.6 58.5,18.6 v1(60,20.1)